# Altium PCB PCB1.PcbDoc
Units mil, origin at the board's own origin, x right, y up, seen from the top; angles counter-clockwise.
Board outline 2756.44 x 1732.81 mil, 2 copper layers (Top Layer, Bottom Layer); 20 components, 16 nets, 67 pads, 4 vias.
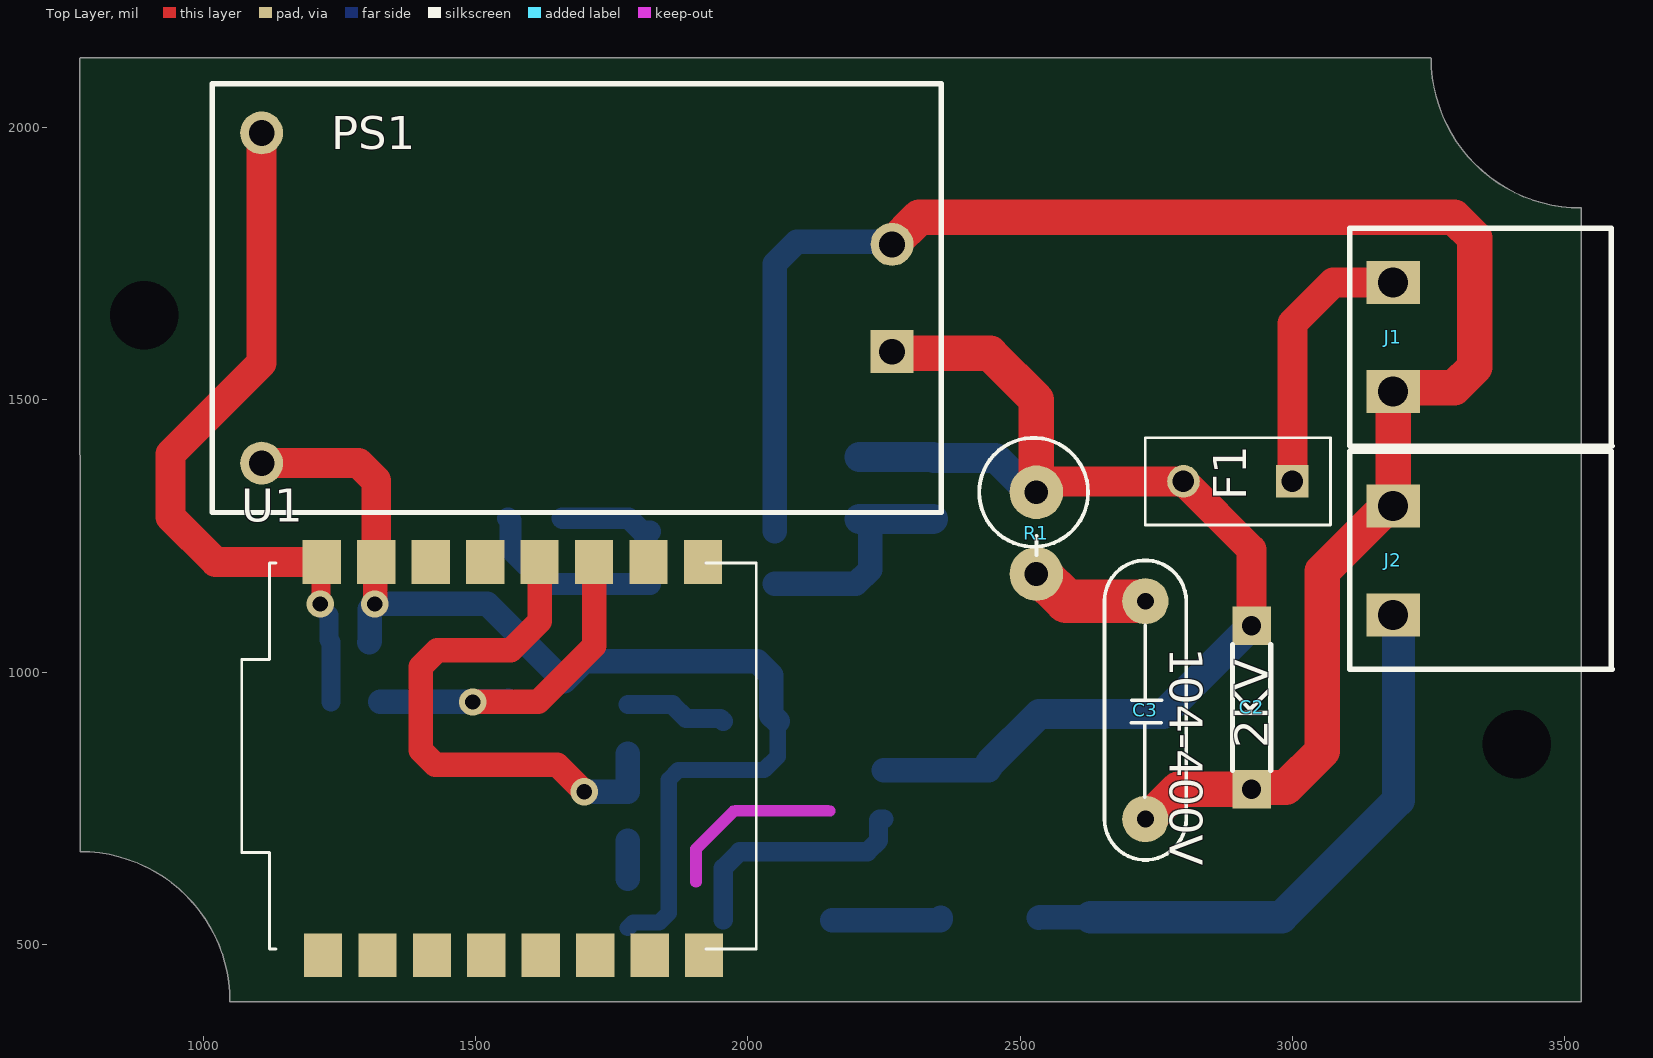
[diagram p0: Top Layer view]
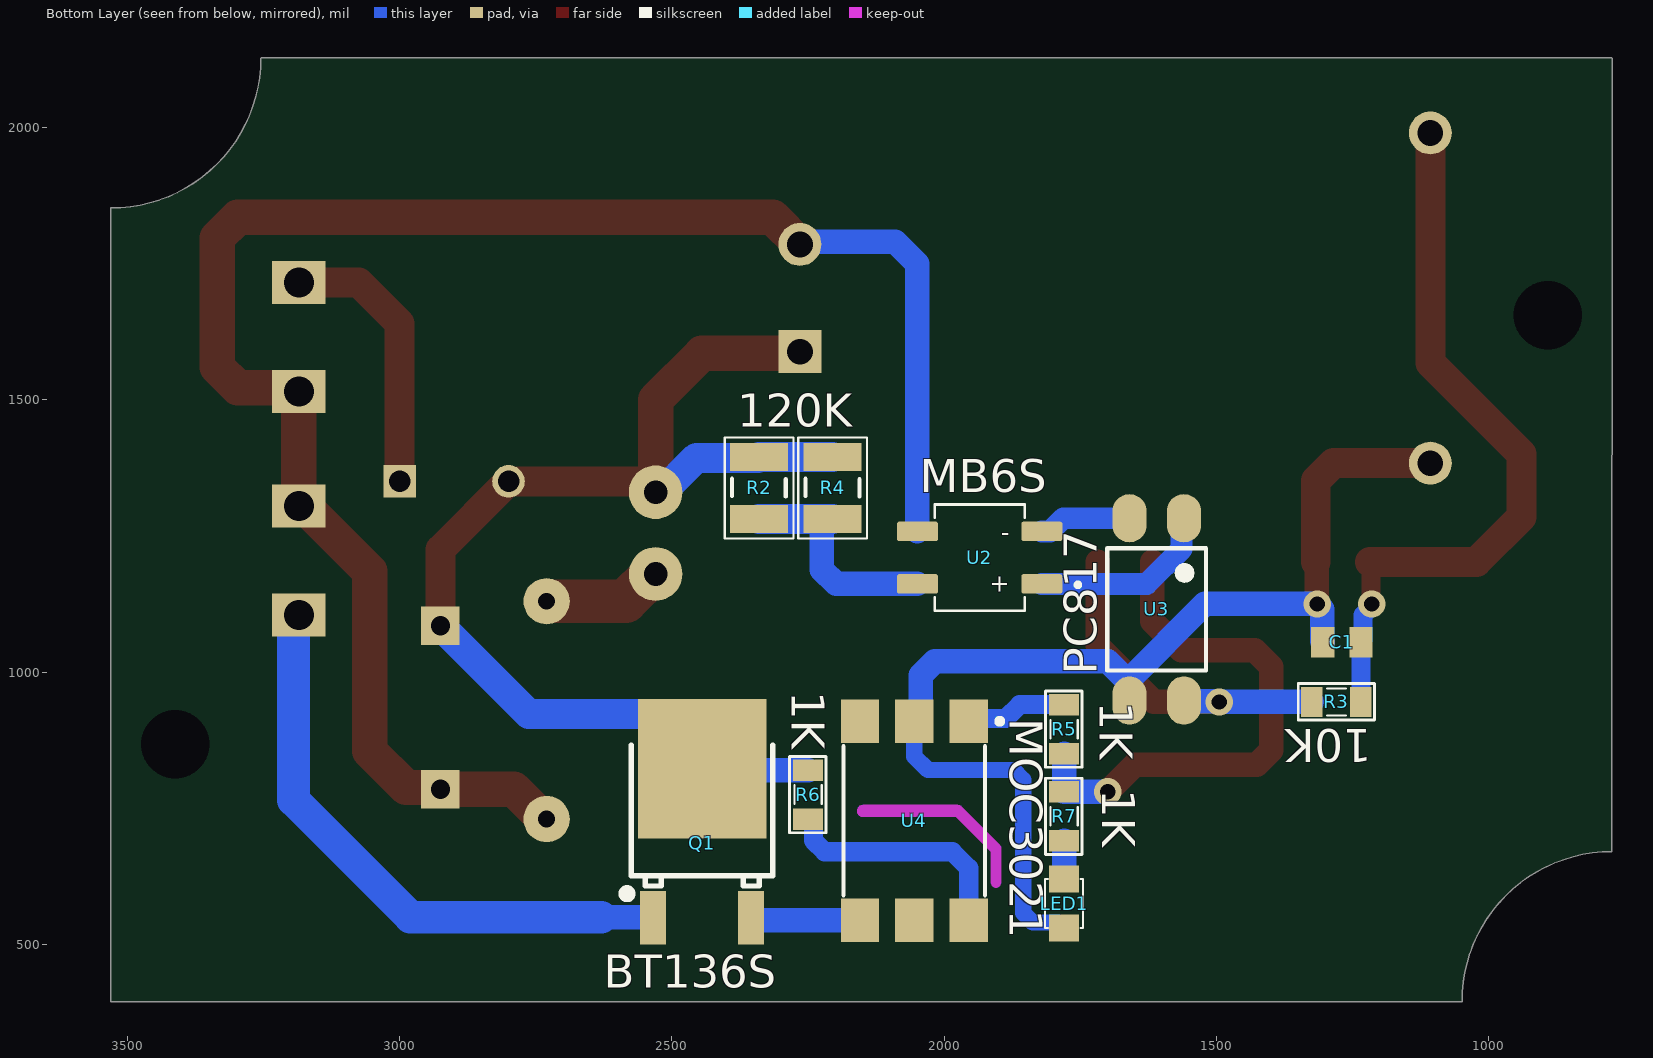
[diagram p1: Bottom Layer view, seen from below]

## Layer stack, top to bottom
Top Solder: solder mask 0.4, Solder Resist, Dk 3.5
Top Layer: signal copper 1.4
Dielectric 1: dielectric 12.6, FR-4, Dk 4.8
Bottom Layer: signal copper 1.4
Bottom Solder: solder mask 0.4, Solder Resist, Dk 3.5

## Board outline
774.1,670.33 cw(c774.09,395) 1049.42,395.01 1049.68,394.74 3530,394.74 3530.26,395 3530.26,1851.69 3529.99,1851.96 cw(c3530,2127.28) 3254.67,2127.28 3254.41,2127.55 774.09,2127.55 773.83,2127.28
cut-out: 1894.98,615 1894.98,675 cw(c1905,675) 1897.92,682.08 1967.92,752.08 cw(c1975,745) 1975,755.01 2150,755.01 cw(c2150,745) 2160.01,745 cw(c2150,745) 2150,734.99 1979.15,734.99 1915.02,670.85 1915.02,615 cw(c1905,615)

## Design rules (kind name [scope] priority, off if disabled: settings)
Clearance Clearance_AC [InNetClass('AC')] p1: gap=50 ignorepadtopadclearanceinfootprint=FALSE
Clearance [All] p2: gap=20 ignorepadtopadclearanceinfootprint=FALSE
PolygonConnect [All] p1: connectstyle=Direct reliefconductorwidth=10 reliefentries=4 polygonreliefangle="90 Angle" airgapwidth=10
RoutingVias [All] p1: holewidth=28 width=50 viastyle="Through Hole" minholewidth=28 minwidth=50 maxholewidth=28 maxwidth=50
SolderMaskExpansion [All] p1: expansion=4 istentingtop=FALSE
SupplyNets "Schematic Supply Nets_1" [InNet('GND')] p1: voltage=0.000
SupplyNets "Schematic Supply Nets" [InNet('+5')] p2: voltage=0.000
Width [All] p1: maxlimit=80 minlimit=30 preferedwidth=45
30 further rules are at their usual default settings.

## Components (designator, comment, footprint, x,y, rotation, side; value= is the part's Value field where it differs from the comment)
C1 "104" "cap 0805" 1270,1055 r0 bottom
C2 "2KV" "Cap 7.5mm" 2925,785 r90 top
C3 "104-400V" "Cap 10mm" 2730,1130 r270 top
F1 "4A" "Fuse rectangular" 3000,1350 r180 top value=Fuse
J1 "AC IN" "CON 2 2EDG5.08" 3185,1715 r270 top
J2 "AC OUT" "CON 2 2EDG5.08" 3185,1305 r270 top
LED1 "RED" LED-0805-Red 1780,620 r270 bottom value="LED 3 - 5 ly 2 Colour"
PS1 "HLK-PM01 5V" CONV_HLK-PM01-3W 2265,1686.57 r180 top
Q1 "BT136S" TO-252-3_L6.6-W6.1-P4.57-LS9.9-BR-CW 2450,725 r270 bottom
R1 "47/2W" R2WD 2530,1130 r90 top value="R2W - 47"
R2 "120K" RES-SMD-1210 2340,1340 r270 bottom
R3 "10K" RES-SMD-0805 1280,945 r0 bottom
R4 "120K" RES-SMD-1210 2205,1340 r270 bottom
R5 "1K" RES-SMD-0805 1780,895 r270 bottom
R6 "1K" RES-SMD-0805 2250,775 r270 bottom
R7 "1K" RES-SMD-0805 1780,735 r270 bottom
U1 "ESP32-C3" ESP32-C3-SMD 1379,-1809 r90 top
U2 "MB6S" TO269AA 1935,1210 r0 bottom
U3 "PC817" SOP4 1610,1115 r270 bottom
U4 "MOC3021" SO6 2055,727.09 r0 bottom

## Footprints (in the part's own frame and the unit in brackets; to place one, negate y for a bottom-side part, rotate by r counter-clockwise, add the part's x,y. Pads: shape width x height; smd on the part's side, far side on the other; paste and mask are expansions set on the pad)
"Cap 7.5mm" [mm] "103 2KV"
  rect 1.8x1.8 hole 0.9: 1(0,0) 2(7.62,0)
  silkscreen extent 0.89,-0.89 6.73,0.89, body extent -0.19,-1.2 7.81,1.19, height 9.03
"Cap 10mm" [mil] "Cap np W 0.4"
  round 85 hole 31: 1(0,0) 2(400,0)
  silkscreen extent -75,-75 475,75, body extent -25,-64 431,64, height 236
"cap 0805" [mm]
  rect 1.08x1.42 smd: 1(-0.895,0) 2(0.895,0)
  body extent -1,-0.63 1,0.63, height 1.4
"CON 2 2EDG5.08" [mm]
  rect 2x2.5 hole 1.4: 1(0,0) 2(5.08,0)
  silkscreen extent -2.54,-2.03 7.62,10.21, body extent -2.5,-1.75 7.58,10.25, height 3.15
CONV_HLK-PM01-3W [mm]
  rect 2x2 hole 1.2: 1(0,2.5)
  round 2 hole 1.2: 2(0,-2.5) 3(29.4,7.7) 4(29.4,-7.7)
  silkscreen extent -2.3,-10 31.7,10, body extent -2.29,-10.1 31.71,10.1, height 15.3
ESP32-C3-SMD [mil]
  rect 80x70 smd: 0(3011,-539) 1(3011,-439) 2(3011,-339) 3(3011,-239) 3.3(3011,-39) 4(3011,-139) 5(2289,159) 5V(3011,161) 6(2289,59) 7(2289,-41) 8(2289,-141) 9(2289,-241) 10(2289,-341) 20(2289,-441) 21(2289,-541) G(3011,61)
  silkscreen extent 2301,-637 3009,308, body extent 2296,-675 3004,270, height 164
"Fuse rectangular" [mil] "5.08 0.6"
  rect 60x60 hole 39.37: 1(0,0)
  round 60 hole 39.37: 2(200,0)
  silkscreen extent -70,-80 270,80, body extent -67,-79 267,79, height 315
LED-0805-Red [mil]
  rect 50x55 smd: 1(0,0) 2(90,0)
  silkscreen extent 0,-35 90,35, body extent 5,-25 85,25, height 43
R2WD [mm] "R2W, 2 pin, 150mil"
  round 2.5 hole 1.1: 1(1.27,0) 2(5.08,0)
  silkscreen extent 2.16,-2.41 7.62,2.67, body extent -1.25,-2.41 7.6,2.59, height 13.97
RES-SMD-0805 [mil]
  rect 39.37x55 smd: 1(-45,0) 2(45,0)
  silkscreen extent -70,-34 70,33, body extent -39,-25 39,25, height 31
RES-SMD-1210 [mm] "Chip Capacitor, Body 3.2x2.5mm, IPC Medium Density"
  rect 1.3x2.7 smd: 1(-1.397,0) 2(1.503,0)
  silkscreen extent -2.3,-1.6 2.4,1.6, body extent -1.6,-1.25 1.6,1.25, height 0.6
SO6 [mil]
  rect 70x80 smd: 1(-100,-182.48) 2(0,-182.48) 3(100,-182.48) 5(0,182.48) 6(-100,182.48)
  rect 70x80 smd mask+0: 4(100,182.48)
  silkscreen extent -162,-187 130,137, body extent -138,-212 138,211, height 141
SOP4 [mm]
  oval 2.25x1.6 smd: 1(-4.25,1.27) 2(-4.25,-1.27) 3(4.25,-1.27) 4(4.25,1.27)
  silkscreen extent -2.85,-2.3 2.85,2.3, body extent -4.67,-2.29 4.93,2.31, height 3.6
TO269AA [mm]
  rrect23% 1.91x0.91 smd: 1(-2.9,1.225) 2(-2.9,-1.225) 3(2.9,-1.225) 4(2.9,1.225)
  silkscreen extent -4.68,-2.48 2.1,2.48, body extent -3.57,-2.44 3.47,2.51, height 2.7
TO-252-3_L6.6-W6.1-P4.57-LS9.9-BR-CW [mm]
  rect 2.5x1.2 smd: 1(4.475,-2.149) 3(4.475,2.423)
  rect 6.5x6 smd: 2(-2.475,0.137)
  silkscreen extent -3.57,-3.56 3.55,3.44, body extent -4.23,-3.29 5.47,3.29, height 2.32

## Part data
C1 C3: library part CN, "Capacitor"
C2: library part "Cap 103 2KV", "Capacitor Ceramic 2KV"
F1: library part Fuse, "Fuse", Designed by=VanDungEvn
J1 J2: library part "CON 2", "CON2 KF terminal"
LED1: library part "LED SMD"
PS1: library part "CONV HLK-PM01", "220VAC to 5V"
Q1: library part BT136-800E_C2901010
R1: library part R2W, "Resistor 2W"
R2 R3 R4 R5 R6 R7: library part Res-SMD, "Resistor", Manufacturer="Generic Components", Class=Passive, Published=08/06/2000, Publisher="Altium Hobart Technology Centre"
U2: "Bridge Rectifier"
U3: library part "OPTO PC817 SMD", "Single Opto"
U4: "Single Opto"

## Free pads (board coordinates)
  round 60 hole 125.98: 1(892.2,1654.84) 1(3411.89,867.44)

## Via types
v1: diameter 50, hole 28, Top Layer to Bottom Layer, 4 vias

## Nets (pads, with @x,y where several pads share a name; then routed paths per layer and width w, separated by ;. In a path a pad name is that pad's centre, name@x,y a point inside that pad or via, vN(x,y) a via of type N, cw(c..) or ccw(c..) an arc to the next point about the centre after c; other vN are vias at no path point)
+5: C1.1 PS1.4 R3.1 U1.5V | length 1353
  Top Layer w35: v1(1215,1125) 1216.5,1126.5 1216.5,1200.5 U1.5V
  Top Layer w55: PS1.4 1107.52,1567.52 940,1400 940,1285 1023,1202 U1.5V
  Bottom Layer w35: v1(1215,1125) 1215,1120.94 1231,1104.94 1231,1058.76 C1.1 1234.88,1054.88 1234.88,945.12 R3.1
AC_L: C2.2 F1.2 PS1.1 Q1.2 R1.2 R2.1 R4.1 R6.1 | length 2199.2
  Top Layer w55: R1.2 2541.75,1330 2561.75,1350 F1.2 2925,1225 C2.2
  Top Layer w65: PS1.1 2268.15,1585 2445,1585 2530,1500 R1.2
  Bottom Layer w45: R6.1 2442.19,820 Q1.2
  Bottom Layer w55: R4.1 R2.1 2341.91,1393.09 2455.16,1393.09 2518.25,1330 R1.2 ; Q1.2@2444.63,832.28 2535.24,922.89 2762.89,922.89 C2.2
AC_LOUT: J2.2 Q1.1 | length 1094.2
  Bottom Layer w45: Q1.1 2534.63,548.88 2535.75,550 2630,550
  Bottom Layer w60: 2630,550 2980,550 3194.84,764.84 3194.84,1095.63 3185.47,1105 J2.2
AC_N: C2.1 C3.2 J1.2 J2.1 PS1.2 U2.3 | length 3334.2
  Top Layer w65: PS1.2 2315,1835 3296.92,1835 3335,1796.92 3335,1559.95 3296.92,1521.87 3191.87,1521.87 J1.2 J2.1 3175.16,1305 3055,1184.84 3055,855 2987.93,787.93 2927.93,787.93 C2.1 2790.41,785 2735.41,730 C3.2
  Bottom Layer w45: U2.3 2049.17,1749.17 2090,1790 2260,1790 PS1.2
DIM: R5.2 R7.1 U1.3 | length 996.6
  Top Layer w45: U1.3 1618,1093 1565,1040 1430,1040 1400,1010 1400,856.36 1426.36,830 1650,830 v1(1700,780)
  Bottom Layer w45: v1(1700,780) R7.1 R5.2
GND: C1.2 LED1.2 PS1.3 U1.G U3.3 U4.2 | length 2040.9
  Top Layer w45: v1(1315,1125) 1315.96,1125.96 1315.96,1199.96 U1.G
  Top Layer w55: PS1.3 1285.78,1383.43 1318,1351.21 U1.G
  Bottom Layer w30: LED1.2 1790,540 1837.43,540 1855,557.57 1855,802.43 1872.57,820 2030,820 2055,845 U4.2
  Bottom Layer w45: C1.2 1306.48,1056.24 1306.48,1115.12 1315,1123.65 v1(1315,1125) 1521.89,1125 1663.44,983.44 1700,1020 2017.25,1020 2043.61,993.64 2043.61,920.95 U4.2
NetC3_1: C3.1 R1.1 | length 220.7
  Top Layer w80: R1.1 2534.99,1180 2584.99,1130 C3.1
NetF1_1: F1.1 J1.1 | length 506.1
  Top Layer w55: F1.1 3000,1640 3075,1715 J1.1
NetLED1_1: LED1.1 R7.2 | length 70
  Bottom Layer w45: LED1.1 R7.2
NetQ1_3: Q1.3 U4.4 | length 203.2
  Bottom Layer w45: U4.4 2353.5,544.61 2354.63,545.73 Q1.3
NetR2_2: R2.2 R4.2 U2.4 | length 432.6
  Bottom Layer w45: U2.4 2198.64,1161.77 2225,1188.13 2225,1277.74 2221.91,1280.83 R4.2
  Bottom Layer w55: R4.2 R2.2
NetR5_1: R5.1 U4.1 | length 187.6
  Bottom Layer w35: R5.1 1861.63,940 1887.07,914.57 1950,914.57 U4.1
NetR6_2: R6.2 U4.6 | length 449.5
  Bottom Layer w35: U4.6 1955,640 1985,670 2219.5,670 2240,690.5 2240,727.82 2242.19,730 R6.2
NetU2_1: U2.1 U3.1 | length 341.4
  Bottom Layer w40: U3.1 1564.4,1277.92 1564.4,1225.6 1628.23,1161.77 U2.1
NetU2_2: U2.2 U3.2 | length 170.8
  Bottom Layer w40: U3.2 1781.22,1282.32 1805.31,1258.23 U2.2
ZC: R3.2 U1.2 U3.4 | length 655.8
  Top Layer w45: v1(1495,945) 1615,945 1718,1048 U1.2
  Bottom Layer w45: R3.2 v1(1495,945) 1495.96,945.96 1558.28,945.96 U3.4
pads on no net: U1.0 U1.1 U1.3.3 U1.4 U1.5 U1.6 U1.7 U1.8 U1.9 U1.10 U1.20 U1.21 U4.3 U4.5

## Keep-outs
Keep-Out Layer:
  lines w20: 1905,615 1905,675 1975,745 2150,745

## Silkscreen, mask and mechanical layers (free items; w line width, h text height)
Mechanical 1:
  circle w0.5: c892.2,1654.84 r59.06
  circle w0.5: c3411.89,867.44 r59.06
  lines w0.5: 970.94,2127.28 774.09,2127.28 ; 774.09,2127.28 774.09,670.59 cw(c774.09,395) 1049.69,395 3530,395 3530,1851.69 cw(c3530,2127.28) 3254.41,2127.28 774.09,2127.28

## Text inside footprints (layer, text, board x,y; h text height)
U2: Bottom Overlay "+" at 1879.93,1174.96 h32.04 r180; Bottom Overlay "-" at 1879.9,1265.1 h32.06 r180